# Altium PCB Controlador de velocidad - Placa superior_1.PcbDoc
Units mil, origin at the board's own origin, x right, y up, seen from the top; angles counter-clockwise.
Board outline 3345.63 x 1457.54 mil, 2 copper layers (Top Layer, Bottom Layer); 38 components, 45 nets, 138 pads, 37 vias.
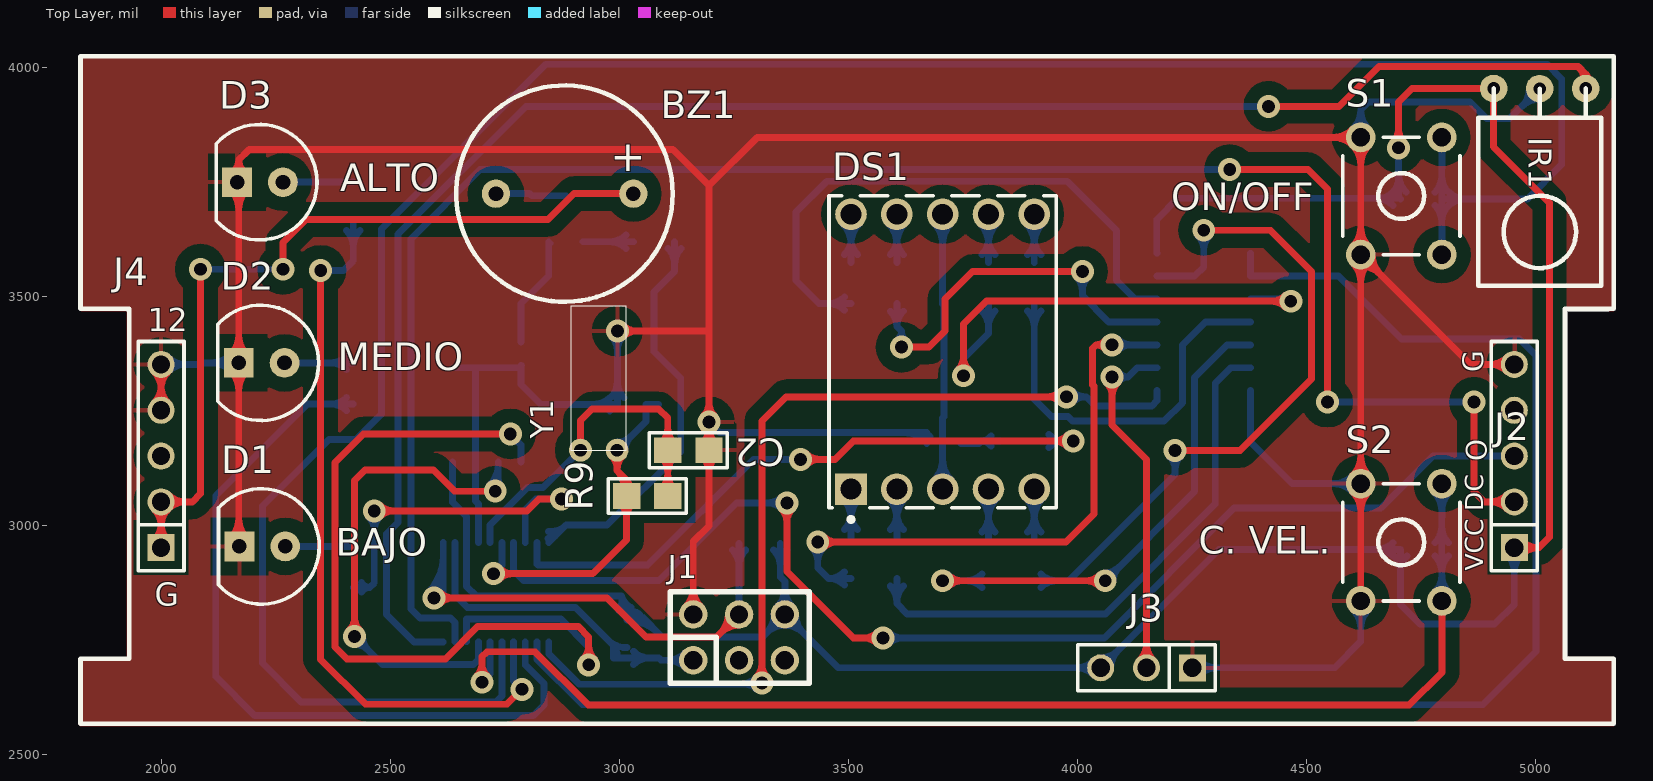
[diagram p0: Top Layer view]
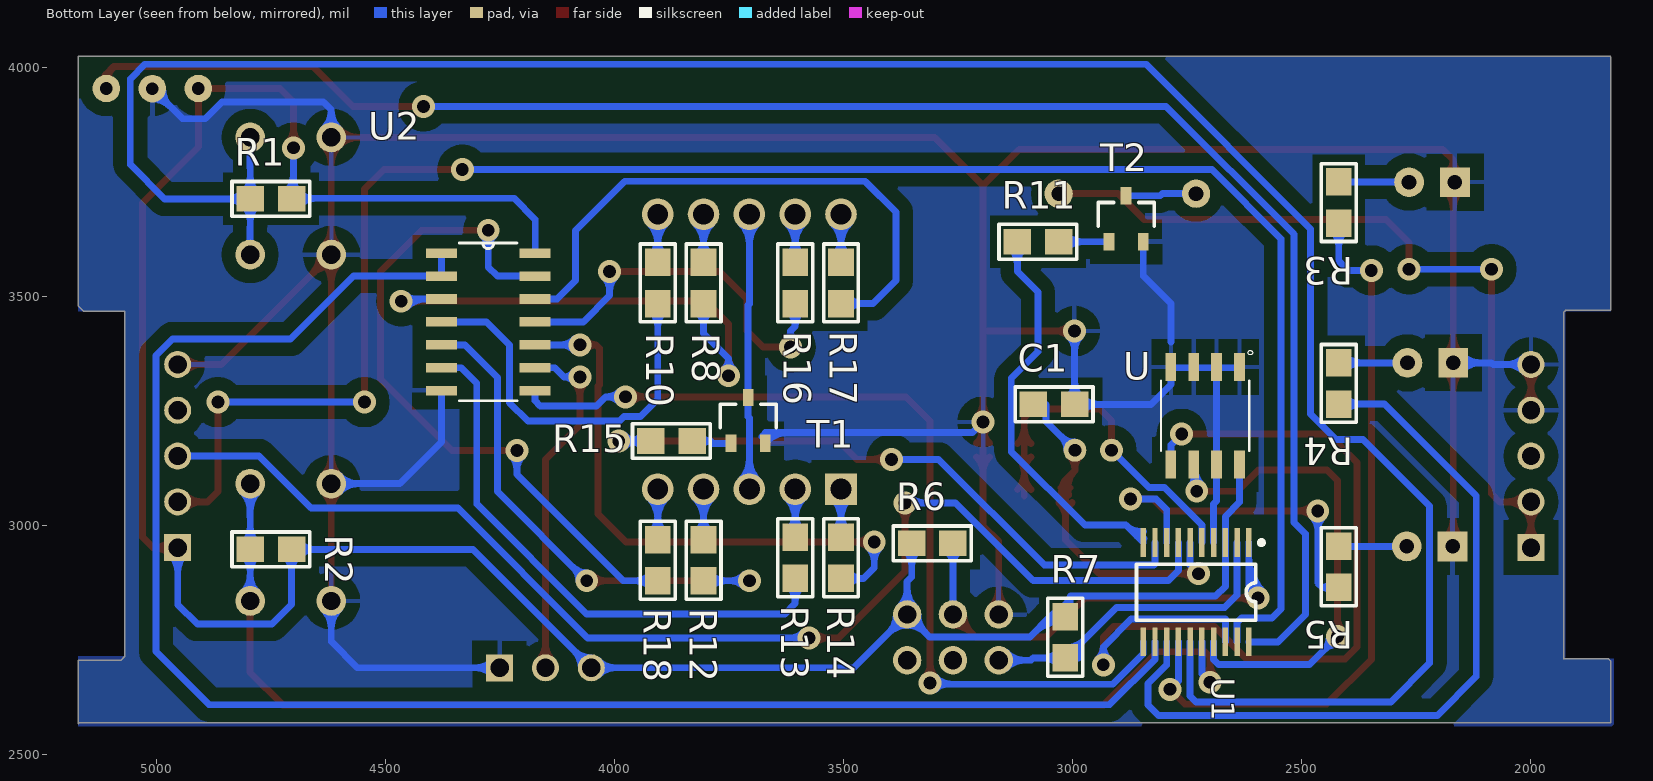
[diagram p1: Bottom Layer view, seen from below]

## Layer stack, top to bottom
Top Layer: signal copper 1.4
Dielectric: dielectric 12.6, FR-4, Dk 4.8
Bottom Layer: signal copper 1.4

## Board outline
1824.37,4023.48 1825.89,4025 5170,4025 5170,3480 5158.76,3468.76 5068.29,3468.76 5068.29,2715.02 5076.85,2706.45 5169.57,2706.45 5169.57,2567.46 5167.03,2570 1825,2570 1825,2705 1830,2710 1927.84,2710 1927.84,3465.32 1924.4,3468.76 1923.15,3470.01 1824.37,3470.01 1824.37,4023.48

## Design rules (kind name [scope] priority, off if disabled: settings)
Clearance gnd [InPolygon] p1: gap=30
Clearance Clearance_1 [All] p2: gap=10
PolygonConnect [All] p1: connectstyle=Relief reliefconductorwidth=10 reliefentries=4 polygonreliefangle="90 Angle"
RoutingVias [All] p1: holewidth=28 width=50 viastyle="Through Hole" minholewidth=28 minwidth=50 maxholewidth=28 maxwidth=50
SilkscreenOverComponentPads [All] p1: minsilkscreentomaskgap=10
SolderMaskExpansion [All] p1: expansion=4
TestPointUsage [All] p1: valid=0 allowmultiple=FALSE
Testpoint [All] p1: side=15 testpointundercomponent=TRUE minsize=40 maxsize=100 preferedsize=60 minholesize=0 maxholesize=40 preferedholesize=32 testpointgrid=1 style=1023 order=0123456789
Width [All] p1: maxlimit=20 minlimit=10 preferedwidth=10 toplayer_minwidth=15 toplayer_prefwidth=15 bottomlayer_minwidth=15 bottomlayer_maxwidth=15 bottomlayer_prefwidth=15 minimp=50.000000 maximp=50.000000 favimp=50.000000
23 further rules are at their usual default settings.

## Components (designator, comment, footprint, x,y, rotation, side; value= is the part's Value field where it differs from the comment)
BZ1 "BUZZER CON OSCILADOR" "BUZZER 12MM" 2880,3725 r180 top
C1 "22p" 0805 3040,3265 r180 bottom
C2 "22p" 0805 3150,3165 r0 top
D1 "ROJO" LED5 2220,2955 r180 top
D2 "AMARILLO" LED5 2218.48,3355.63 r180 top
D3 "VERDE" LED5 2215,3750 r180 top
DS1 "HDSP-5503" H-10 3705,3380 r0 top
IR1 "IRM8601S" IRM8601S 5142.01,3891.1 r180 top
J1 "BDM Port" JBDM 3160.63,2706.52 r0 top
J2 "CONECTOR-P. INFERIOR" SIP5 4952.83,2952.18 r90 top
J3 "JUMPER" JUMPER3 4150,2690 r180 top
J4 "CONECTOR-P. INFERIOR" SIP5 1999,2952.18 r90 top
R1 "10k" 0805 4749.37,3713.48 r180 bottom
R2 "10k" 0805 4749.37,2948.48 r180 bottom
R3 "330" 0805 2418.48,3705.63 r270 bottom
R4 "330" 0805 2418.48,3310.63 r270 bottom
R5 "330" 0805 2418.48,2910.63 r270 bottom
R6 "4K7" 0805 3305.63,2961.52 r180 bottom
R7 "4K7" 0805 3015.63,2756.52 r270 bottom
R8 "330" 0805 3805,3530 r90 bottom
R9 "3M" 0805 3060,3065 r180 top (schematic designator R5)
R10 "330" 0805 3905,3530 r90 bottom
R11 "10K" 0805 3075,3620 r180 bottom
R12 "330" 0805 3805,2925 r90 bottom
R13 "330" 0805 3605,2930 r90 bottom
R14 "330" 0805 3505,2930 r90 bottom
R15 "10k" 0805 3875,3185 r180 bottom
R16 "330" 0805 3605,3530 r90 bottom
R17 "330" 0805 3505,3530 r90 bottom
R18 "330" 0805 3905,2925 r90 bottom
S1 "ON/OFF" TACTSWITCH 4706.1,3719.85 r0 top
S2 "CV" TACTSWITCH 4706.1,2963.95 r0 top
T1 "BC817" SOT23 3745,3180 r180 bottom
T2 "BC817" SOT23 2920,3620 r180 bottom
U "24C64" SOIC127P600X175-8N 2710,3240 r270 bottom
U1 "MC9S08SH4 (TSSOP20)" TSSOP20 2730,2855 r0 bottom
U2 "74HC164D" SOIC127P600X175-14N 4275,3445 r180 bottom (schematic designator U1)
Y1 "32.768 KHz" X32768 2995,3165 r180 top

## Footprints (in the part's own frame and the unit in brackets; to place one, negate y for a bottom-side part, rotate by r counter-clockwise, add the part's x,y. Pads: shape width x height; smd on the part's side, far side on the other; paste and mask are expansions set on the pad)
0805 [mil] "Pasivo 0805"
  rect 60x56 smd: 1(-45,0) 2(45,0)
  silkscreen extent -85,-38 85,38, body extent -40,-25 39,25, height 15
"BUZZER 12MM" [mil]
  round 62 hole 32: 1(-150,0) 2(150,0)
  silkscreen extent -236,-236 236,236, body extent -368,-236 240,236, height 380
H-10 [mil] "LED, 7-Segment Display, 14.22 mm, RHD; 10 Leads; Row Space 15.24 mm; Pitch 2.54 mm"
  rect 69x69 hole 45.5: 1(-200,-300)
  round 69 hole 45.5: 2(-100,-300) 3(0,-300) 4(100,-300) 5(200,-300) 6(200,300) 7(100,300) 8(0,300) 9(-100,300) 10(-200,300)
  silkscreen extent -248,-371 248,341
IRM8601S [mm]
  round 1.524 hole 0.7: 1(0.85,-1.61) 2(3.4,-1.6) 3(5.95,-1.61)
  silkscreen extent -0.01,-1.61 6.8,9.33
JBDM [mil]
  round 62 hole 40: 1(0,0) 2(0,100) 3(100,0) 4(100,100) 5(200,0) 6(200,100)
  silkscreen extent -50,-50 253,150
JUMPER3 [mm]
  rect 1.5x1.5 hole 1.016: 1(-2.54,0)
  round 1.5 hole 1.016: 2(0,0) 3(2.54,0)
  silkscreen extent -3.81,-1.27 3.81,1.27, body extent -3.81,-1.3 3.81,1.27, height 16.15
LED5 [mil]
  round 65 hole 32: 1(-50,0)
  rect 65x65 hole 32: 2(50,0)
  silkscreen extent -124,-126 96,126, body extent -117,-117 97,120, height 485
SIP5 [mm]
  rect 1.5x1.5 hole 1.016: 1(0,0)
  round 1.5 hole 1.016: 2(2.54,0) 3(5.08,0) 4(7.62,0) 5(10.16,0)
  silkscreen extent -1.27,-1.27 11.43,1.27, body extent -1.27,-1.27 11.43,1.27, height 8.38
SOIC127P600X175-8N [mm]
  rect 1.55x0.6 smd: 1(-2.7,1.905) 2(-2.7,0.635) 3(-2.7,-0.635) 4(-2.7,-1.905) 5(2.7,-1.905) 6(2.7,-0.635) 7(2.7,0.635) 8(2.7,1.905)
  silkscreen extent -3.63,-2.45 1.95,2.63
SOIC127P600X175-14N [mil]
  rect 67x21 smd: 1(-102,150) 2(-102,100) 3(-102,50) 4(-102,0) 5(-102,-50) 6(-102,-100) 7(-102,-150) 8(102,-150) 9(102,-100) 10(102,-50) 11(102,0) 12(102,50) 13(102,100) 14(102,150)
  silkscreen extent -63,-172 63,172
SOT23 [mm]
  rect 0.6x0.95 smd: 1(0,0) 2(0.95,2.55) 3(1.9,0)
  silkscreen extent -0.6,0.87 2.5,2.18, body extent -0.53,-0.25 2.47,2.88, height 1
TACTSWITCH [mil]
  round 65 hole 40: 1(-88.58,-127.95) 1(-88.58,127.95) 2(88.58,-127.95) 2(88.58,127.95)
  silkscreen extent -128,-128 128,128, body extent -120,-156 124,156, height 276
TSSOP20 [mm]
  rect 0.3x1.6 smd: 1(-2.925,-2.75) 2(-2.275,-2.75) 3(-1.625,-2.75) 4(-0.975,-2.75) 5(-0.325,-2.75) 6(0.325,-2.75) 7(0.975,-2.75) 8(1.625,-2.75) 9(2.275,-2.75) 10(2.925,-2.75) 11(2.925,2.75) 12(2.275,2.75) 13(1.625,2.75) 14(0.975,2.75) 15(0.325,2.75) 16(-0.325,2.75) 17(-0.975,2.75) 18(-1.625,2.75) 19(-2.275,2.75) 20(-2.925,2.75)
  silkscreen extent -3.75,-2.87 3.3,1.55
X32768 [mil]
  round 50 hole 28: 1(80.5,0) 2(0.5,0)
  silkscreen extent -19,-315 101,0

## Part data
BZ1: library part BUZZER
C1 C2: library part CAP
D1 D2 D3: library part LED
DS1: "14.22 mm Gray Surface HER 7-Segment Display: CC, RH DP"
IR1: "Sensor IR"
J1: library part JBDM
J2 J4: library part CON5
J3: library part JUMPER3
R1 R2 R3 R4 R5 R6 R7 R8 R9 R10 R11 R12 R13 R14 R15 R16 R17 R18: library part RES
S1 S2: library part "TACT SWITCH"
T1 T2: library part "TRANSISTOR NPN"
U: library part AT24C256C-SSHL-T, "EEPROM Memory IC 256Kb _32K x 8_ I²C 1MHz 550ns 8-SOIC"
U1: library part MC9S08SH8_20
U2: library part 74HC164D,653, "Shift Shift Register 1 Element 8 Bit 14-SO"
Y1: library part CRYSTAL

## Via types
v1: diameter 50, hole 28, Top Layer to Bottom Layer, 37 vias

## Nets (pads, with @x,y where several pads share a name; then routed paths per layer and width w, separated by ;. In a path a pad name is that pad's centre, name@x,y a point inside that pad or via, vN(x,y) a via of type N, cw(c..) or ccw(c..) an arc to the next point about the centre after c; other vN are vias at no path point)
12V: BZ1.1 J4.1 J4.2 | length 1983.7
  Top Layer w15: J4.1@1983.42,2967.75 ccw(c1945.82,3005.36) 1999,3005.36 ccw(c2052.18,3005.36) J4.1@2014.57,2967.75 ; J4.2@1983.42,3036.6 cw(c1945.82,2999) 1999,2999 cw(c2052.18,2999) 2014.57,3036.6 cw(c2052.18,2999) 2052.18,3052.18 cw(c2052.18,3105.36) J4.2@2014.57,3067.75 ; J4.1 J4.2 2067.18,3052.18 2085,3070 2085,3555 v1@2090,3560 ; v1(2265,3560) 2265,3618.48 2315,3668.48 2843.48,3668.48 2900,3725 BZ1.1
  Bottom Layer w15: v1(2085,3560) v1(2265,3560)
A4: J1.1 R7.2 U1.2 | length 954.2
  Bottom Layer w15: U1.2 2640.43,2848.48 2667.43,2821.48 2903.37,2821.48 2986.37,2738.48 2986.37,2711.52 R7.2 3085.37,2711.52 3090.37,2706.52 J1.1 ; 2973.27,2751.57 ccw(c3015.64,2793.93) R7.2@3015.64,2734.02 ; 2983.69,2741.15 cw(c2956.06,2713.52) R7.2@2995.14,2713.52 ; R7.2@3030.13,2697.03 cw(c3065.13,2662.03) 3065.13,2711.52 cw(c3065.13,2761.01) R7.2@3030.13,2726.02 ; J1.1@3144.02,2689.91 ccw(c3103.9,2649.79) 3103.9,2706.52 ccw(c3103.9,2763.26) J1.1@3144.02,2723.14
A5: J1.4 R6.2 U1.1 | length 1413.7
  Top Layer w15: v1(2594.84,2842.48) 2972.52,2842.48 3057.52,2757.48 3211.59,2757.48 J1.4 ; v1@2607.22,2830.1 cw(c2637.09,2800.23) 2637.09,2842.48 cw(c2637.09,2884.73) v1@2607.22,2854.85 ; J1.4@3237.14,2806.52 cw(c3180.4,2806.52) 3220.52,2766.41 cw(c3260.64,2726.29) J1.4@3260.64,2783.02
  Bottom Layer w15: v1@2582.47,2854.85 ccw(c2504.31,2933.01) U1.1@2614.84,2933.01 ; v1@2593.07,2844.24 ccw(c2540.52,2896.8) 2614.84,2896.8 ; v1(2594.84,2842.48) 2614.84,2862.48 U1.1 ; v1@2603.68,2833.64 ccw(c2576.73,2860.58) 2614.84,2860.58 ; R6.2@3246.14,2947.03 cw(c3211.14,2912.03) 3260.64,2912.03 cw(c3310.13,2912.03) R6.2@3275.13,2947.03 ; J1.4 R6.2
B6: C1.1 R9.2 U1.6 Y1.2 | length 1176.6
  Top Layer w15: v1(2724.37,2895.48) 2941.37,2895.48 3015,2969.11 R9.2 3015,3100 ; v1@2736.74,2883.1 cw(c2766.61,2853.23) 2766.61,2895.48 cw(c2766.61,2937.73) v1@2736.74,2907.85 ; Y1.2@2982.12,3152.63 cw(c2952.25,3122.75) 2994.5,3122.75 cw(c3036.75,3122.75) Y1.2@3006.87,3152.63 ; 2993.84,3121.16 cw(c2954.87,3082.18) R9.2@3007.72,3066.56 ; Y1.2 2994.5,3120.5 3015,3100 ; R9.2@3000.5,3050.51 cw(c2965.51,3015.51) 3015,3015.51 cw(c3064.49,3015.51) R9.2@3029.49,3050.51 ; R9.2@3004.97,3082.88 ccw(c2995.37,3100) 3015,3100 ; 3011.68,3103.32 cw(c2982.41,3074.04) R9.2@3022.11,3062.31 ; R9.2@3025.03,3082.88 cw(c3034.63,3100) 3015,3100
  Bottom Layer w15: v1(2724.37,2895.48) 2742.8,2913.91 U1.6 ; Y1.2 3057.37,3227.87 3057.37,3265 C1.1 ; Y1.2@2994.5,3182.5 ccw(c2994.5,3224.75) 3024.37,3194.88 ccw(c3054.25,3165) Y1.2@3012,3165
B7: C2.1 R9.1 U1.5 Y1.1 | length 980.3
  Top Layer w15: Y1.1 2914.5,3229.5 2940,3255 3085,3255 3105,3235 C2.1 R9.1 ; R9.1@3090.5,3079.5 ccw(c3055.51,3114.49) 3105,3114.49 ccw(c3154.49,3114.49) R9.1@3119.49,3079.5 ; C2.1@3090.5,3150.51 cw(c3055.51,3115.51) 3105,3115.51 cw(c3154.49,3115.51) C2.1@3119.49,3150.51 ; C2.1@3090.5,3179.5 ccw(c3055.51,3214.49) 3105,3214.49 ccw(c3154.49,3214.49) C2.1@3119.49,3179.5
  Bottom Layer w15: U1.5 2717.2,3001.48 2799.2,3083.48 2832.98,3083.48 Y1.1
BUZZER: R11.1 U1.10 | length 1009
  Bottom Layer w15: U1.10@2843.91,2972.31 ccw(c2845.48,2993.16) 2860.26,2978.38 ; U1.10@2845.04,2987.27 ccw(c2848.73,3036.11) 2883.36,3001.48 ; U1.10 2883.37,3001.48 ; R11.1@3105.5,3605.51 cw(c3070.51,3570.51) 3120,3570.51 cw(c3169.49,3570.51) R11.1@3134.49,3605.51 ; R11.1 3120,3555 3075,3510 3075,3380 3133.37,3321.63 3133.37,3162.48 2972.37,3001.48 2883.37,3001.48
CLOCK: U1.11 U2.8 | length 2276.6
  Top Layer w15: v1@3297.99,2668.85 ccw(c3268.12,2698.73) 3310.37,2698.73 ccw(c3352.61,2698.73) v1@3322.74,2668.85 ; v1(3310.37,2656.48) 3310.37,3228.48 3363.37,3281.48 v1(3975.37,3281.48) ; v1@3962.99,3269.1 ccw(c3933.12,3239.23) 3933.12,3281.48 ccw(c3933.12,3323.73) v1@3962.99,3293.85
  Bottom Layer w15: U1.11 2845.16,2721.48 2912.66,2653.98 3307.87,2653.98 v1(3310.37,2656.48) ; 3262.08,2653.98 ccw(c3262.08,2704.76) v1@3297.99,2668.85 ; 3274.15,2653.98 cw(c3274.15,2620.26) v1@3297.99,2644.1 ; v1(3975.37,3281.48) 4018.52,3281.48 4038.52,3261.48 4161.48,3261.48 4173,3273 U2.8 ; v1@3987.74,3269.1 cw(c4017.61,3239.23) 4017.61,3281.48 cw(c4017.61,3323.73) v1@3987.74,3293.85
CV: R2.1 S2.2 U1.16 | length 3141.2
  Top Layer w15: v1@2686.99,2670.85 ccw(c2657.12,2700.73) 2699.37,2700.73 ccw(c2741.61,2700.73) v1@2711.74,2670.85 ; v1(2699.37,2658.48) 2699.37,2714.37 2710,2725 2815,2725 2931.52,2608.48 4723.48,2608.48 4794.68,2679.68 S2.2@4794.68,2836
  Bottom Layer w15: v1(2699.37,2658.48) 2717.2,2676.31 U1.16 ; S2.2@4777,3074.23 cw(c4734.33,3031.55) 4794.68,3031.55 cw(c4855.04,3031.55) S2.2@4812.36,3074.23 ; S2.2@4778.12,2854.73 ccw(c4745.63,2891.47) 4794.68,2891.47 ccw(c4843.74,2891.47) S2.2@4811.24,2854.73 ; R2.1@4779.87,2933.98 cw(c4744.87,2898.99) 4794.37,2898.99 cw(c4843.86,2898.99) R2.1@4808.86,2933.98 ; R2.1@4779.87,2962.97 ccw(c4744.87,2997.97) 4794.37,2997.97 ccw(c4843.86,2997.97) R2.1@4808.86,2962.97 ; S2.2@4794.68,2836 4794.68,2891.48 4794.37,2891.79 R2.1 4794.37,3019.48 4794.68,3019.79 S2.2@4794.68,3091.9
DATA: U1.12 U2.1 U2.2 | length 3699.4
  Bottom Layer w15: U1.12 2819.57,2708.48 2918.57,2609.48 4884.48,2609.48 5000.37,2725.37 5000.37,3371.48 4964.37,3407.48 4706.89,3407.48 4569.37,3545 U2.2 U2.1
DC0: J2.2 U1.19 | length 4199.8
  Top Layer w15: v1(4331.52,3777.48) 4502.52,3777.48 4545,3735 v1(4545,3270) ; v1(4865,3270) 4865,3075 4887.82,3052.18 J2.2 ; J2.2@4937.25,3036.6 ccw(c4899.65,2999) 4899.65,3052.18 ccw(c4899.65,3105.36) J2.2@4937.25,3067.75
  Bottom Layer w15: U1.19 2640.43,2788.48 2630.43,2798.48 2564.37,2798.48 2544.37,2818.48 2544.37,3626.48 2695.37,3777.48 v1(4331.52,3777.48) ; v1(4545,3270) v1(4865,3270)
GND: C1.2 C2.2 D1.2 D2.2 D3.2 IR1.2 J1.2 J2.5 J3.1 J4.4 J4.5 S1.1 S2.1 T1.3 T2.3 U1.4 U2.7 U.1 U.2 U.3 U.4 U.7 | length 12060.2
  Top Layer w15: J4.4@1983.42,3267.75 ccw(c1945.82,3305.36) 1999,3305.36 ccw(c2052.18,3305.36) J4.4@2014.57,3267.75 ; J4.5@1983.42,3336.6 cw(c1945.82,3299) 1999,3299 cw(c2052.18,3299) J4.5@2014.57,3336.6 ; J4.4 J4.5 ; D1.2@2150.8,2973.31 ccw(c2108.12,3015.99) 2168.48,3015.99 ccw(c2228.83,3015.99) D1.2@2186.15,2973.31 ; D2.2@2150.8,3337.96 cw(c2108.12,3295.28) 2168.48,3295.28 cw(c2228.83,3295.28) D2.2@2186.15,3337.96 ; D2.2@2150.8,3373.31 ccw(c2108.12,3415.99) 2168.48,3415.99 ccw(c2228.83,3415.99) D2.2@2186.15,3373.31 ; D3.2@2150.8,3732.96 cw(c2108.12,3690.28) 2168.48,3690.28 cw(c2228.83,3690.28) D3.2@2186.15,3732.96 ; D3.2@2154.2,3771.16 ccw(c2135.2,3798.48) 2168.48,3798.48 ; D1.2@2168.48,2955.63 D2.2 2168.48,3798.48 ; D3.2@2182.75,3771.16 cw(c2201.75,3798.48) 2168.48,3798.48 ; v1(2995,3425) 3195,3425 ; v1@3007.37,3412.63 cw(c3037.25,3382.75) 3037.25,3425 cw(c3037.25,3467.25) v1@3007.37,3437.37 ; J1.2@3144.02,2823.14 ccw(c3103.9,2863.26) 3160.64,2863.26 ccw(c3217.37,2863.26) J1.2@3177.25,2823.14 ; J1.2 3160.64,2965.64 3195,3000 C2.2 v1(3195,3226.64) 3195,3742.48 ; C2.2@3180.5,3150.51 cw(c3145.51,3115.51) 3195,3115.51 cw(c3244.49,3115.51) C2.2@3209.49,3150.51 ; C2.2@3180.5,3179.5 ccw(c3145.51,3214.49) 3195,3214.49 ccw(c3244.49,3214.49) C2.2@3209.49,3179.5 ; v1@3182.62,3214.27 cw(c3152.75,3184.4) 3195,3184.4 cw(c3237.25,3184.4) v1@3207.37,3214.27 ; v1@3182.62,3239.02 ccw(c3152.75,3268.89) 3195,3268.89 ccw(c3237.25,3268.89) v1@3207.37,3239.02 ; S2.1@4599.84,3074.23 cw(c4557.16,3031.55) 4617.52,3031.55 cw(c4677.87,3031.55) S2.1@4635.19,3074.23 ; S2.1@4599.84,3109.58 ccw(c4557.16,3152.26) 4617.52,3152.26 ccw(c4677.87,3152.26) S2.1@4635.19,3109.58 ; S1.1@4599.84,3574.23 cw(c4557.16,3531.55) 4617.52,3531.55 cw(c4677.87,3531.55) S1.1@4635.19,3574.23 ; S1.1@4599.84,3609.58 ccw(c4557.16,3652.26) 4617.52,3652.26 ccw(c4677.87,3652.26) S1.1@4635.19,3609.58 ; S1.1@4599.84,3865.48 cw(c4557.16,3908.16) 4557.16,3847.81 cw(c4557.16,3787.45) 4599.84,3830.13 cw(c4557.16,3787.45) 4617.52,3787.45 cw(c4677.87,3787.45) S1.1@4635.19,3830.13 ; S2.1@4617.52,2836 4617.52,3091.9 S1.1@4617.52,3591.9 ; S1.1@4617.52,3566.9 cw(c4617.52,3506.55) 4660.19,3549.23 cw(c4702.87,3591.9) S1.1@4642.52,3591.9 ; J2.5@4937.25,3336.6 ccw(c4899.65,3299) 4899.65,3352.18 ccw(c4899.65,3405.36) J2.5@4937.25,3367.75 ; J2.5 4857.24,3352.18 S1.1@4617.52,3591.9 ; 2168.48,3798.48 2191.48,3821.48 3116,3821.48 3195,3742.48 ; 3195,3742.48 3300.33,3847.81 4617.52,3847.81 S1.1@4617.52,3591.9
  Bottom Layer w15: J4.5 2081.37,3352.18 2084.82,3355.63 D2.2 ; J4.5@2014.57,3336.6 cw(c2052.18,3299) 2052.18,3352.18 cw(c2052.18,3405.36) J4.5@2014.57,3367.75 ; D2.2@2150.8,3337.96 ccw(c2108.12,3295.28) 2108.12,3355.63 ccw(c2108.12,3415.99) D2.2@2150.8,3373.31 ; U.1@2635,3345 U.2@2685,3345 ; U1.4 2691.61,3047.48 2685,3054.09 U.2@2685,3345 ; 2785,3401 2785,3485 2845.2,3545.2 T2.3 ; T2.3@2845.2,3613.48 T2.3@2848.46,3616.74 ; C1.2@2978.5,3250.51 ccw(c2943.51,3215.51) 2943.51,3265 ccw(c2943.51,3314.49) C1.2@2978.5,3279.5 ; C1.2@2980.5,3279.5 ccw(c2945.51,3314.49) 2995,3314.49 ccw(c3044.49,3314.49) C1.2@3009.49,3279.5 ; v1@2982.63,3412.63 cw(c2952.75,3382.75) 2995,3382.75 cw(c3037.25,3382.75) v1@3007.37,3412.63 ; v1@2995,3415 C1.2 2828.48,3265 2785,3308.48 2785,3350 2786,3350 2781,3345 U.2@2685,3345 ; v1(3195,3226.64) 3218.17,3203.48 3670.2,3203.48 T1.3 ; 3619.75,3203.48 cw(c3619.75,3136.44) T1.3@3667.15,3183.84 ; 3655.96,3203.48 cw(c3655.96,3172.65) T1.3@3677.76,3194.45 ; J3.1 4560,2690 4617.52,2747.52 S2.1@4617.52,2836 ; J3.1@4265.57,2674.42 cw(c4303.18,2636.82) 4303.18,2690 cw(c4303.18,2743.18) J3.1@4265.57,2705.58 ; U2.7 4377,3183 4468.1,3091.9 S2.1@4617.52,3091.9 ; S2.1@4599.84,2818.32 cw(c4557.16,2775.64) 4617.52,2775.64 cw(c4677.87,2775.64) S2.1@4635.19,2818.32 ; S2.1@4599.84,3074.23 ccw(c4557.16,3031.55) 4557.16,3091.9 ccw(c4557.16,3152.26) S2.1@4599.84,3109.58 ; S1.1@4599.97,3865.62 ccw(c4558.72,3907.51) 4617.52,3907.51 ; S1.1@4617.52,3847.81 4617.52,3907.52 ; S1.1@4635.06,3865.62 cw(c4676.31,3907.51) 4617.52,3907.51 ; IR1.2@4985.66,3954.09 cw(c4931.34,3954.09) 4969.75,3915.68 cw(c5008.16,3877.27) IR1.2@5008.16,3931.59 ; IR1.2 4942.54,3888.48 4892.54,3888.48 4856.01,3925 4635,3925 4617.52,3907.52
NetBZ1_2: BZ1.2 T2.2 | length 154.5
  Bottom Layer w15: BZ1.2 2803.37,3725 2807.97,3720.39 T2.2
NetD1_1: D1.1 R5.1 | length 140
  Bottom Layer w15: D1.1 R5.1@2410,2955
NetD2_1: D2.1 R4.1 | length 227.7
  Bottom Layer w15: D2.1 R4.1 ; R4.1@2403.98,3341.14 ccw(c2368.99,3306.14) 2368.99,3355.63 ccw(c2368.99,3405.13) R4.1@2403.98,3370.13
NetD3_1: D3.1 R3.1 | length 149.1
  Bottom Layer w15: D3.1@2269.37,3750.63 R3.1
NetDS1_1: DS1.1 R14.2 | length 285.1
  Bottom Layer w15: DS1.1@3485.91,3060.91 cw(c3439.82,3014.82) 3505,3014.82 cw(c3570.18,3014.82) DS1.1@3524.09,3060.91 ; R14.2@3490.5,2991.5 ccw(c3455.51,3026.49) 3505,3026.49 ccw(c3554.49,3026.49) R14.2@3519.49,2991.5 ; R14.2 DS1.1
NetDS1_2: DS1.2 R13.2 | length 285.1
  Bottom Layer w15: DS1.2@3585.91,3060.91 cw(c3539.82,3014.82) 3605,3014.82 cw(c3670.18,3014.82) DS1.2@3624.09,3060.91 ; R13.2@3590.5,2991.5 ccw(c3555.51,3026.49) 3605,3026.49 ccw(c3654.49,3026.49) R13.2@3619.49,2991.5 ; R13.2 DS1.2
NetDS1_3: DS1.3 DS1.8 T1.2 | length 806.9
  Bottom Layer w15: DS1.3@3685.91,3099.09 ccw(c3639.82,3145.18) 3705,3145.18 ccw(c3770.18,3145.18) DS1.3@3724.09,3099.09 ; DS1.8@3685.91,3660.91 cw(c3639.82,3614.82) 3705,3614.82 cw(c3770.18,3614.82) DS1.8@3724.09,3660.91 ; DS1.3 3705,3235.48 3707.6,3238.08 3707.6,3273.48 T1.2 3707.6,3481.51 3705,3484.11 DS1.8
NetDS1_4: DS1.4 R12.2 | length 290.1
  Bottom Layer w15: DS1.4@3785.91,3060.91 cw(c3739.82,3014.82) 3805,3014.82 cw(c3870.18,3014.82) DS1.4@3824.09,3060.91 ; R12.2@3790.5,2986.5 ccw(c3755.51,3021.49) 3805,3021.49 ccw(c3854.49,3021.49) R12.2@3819.49,2986.5 ; R12.2 DS1.4
NetDS1_5: DS1.5 R18.2 | length 290.1
  Bottom Layer w15: DS1.5@3885.91,3060.91 cw(c3839.82,3014.82) 3905,3014.82 cw(c3970.18,3014.82) DS1.5@3924.09,3060.91 ; R18.2@3890.5,2986.5 ccw(c3855.51,3021.49) 3905,3021.49 ccw(c3954.49,3021.49) R18.2@3919.49,2986.5 ; R18.2 DS1.5
NetDS1_6: DS1.6 R10.2 | length 285.1
  Bottom Layer w15: DS1.6@3885.91,3660.91 cw(c3839.82,3614.82) 3905,3614.82 cw(c3970.18,3614.82) DS1.6@3924.09,3660.91 ; R10.2@3890.5,3591.5 ccw(c3855.51,3626.49) 3905,3626.49 ccw(c3954.49,3626.49) R10.2@3919.49,3591.5 ; R10.2 DS1.6
NetDS1_7: DS1.7 R8.2 | length 285.1
  Bottom Layer w15: DS1.7@3785.91,3660.91 cw(c3739.82,3614.82) 3805,3614.82 cw(c3870.18,3614.82) DS1.7@3824.09,3660.91 ; R8.2@3790.5,3591.5 ccw(c3755.51,3626.49) 3805,3626.49 ccw(c3854.49,3626.49) R8.2@3819.49,3591.5 ; R8.2 DS1.7
NetDS1_9: DS1.9 R16.2 | length 285.1
  Bottom Layer w15: DS1.9@3585.91,3660.91 cw(c3539.82,3614.82) 3605,3614.82 cw(c3670.18,3614.82) DS1.9@3624.09,3660.91 ; R16.2@3590.5,3591.5 ccw(c3555.51,3626.49) 3605,3626.49 ccw(c3654.49,3626.49) R16.2@3619.49,3591.5 ; R16.2 DS1.9
NetDS1_10: DS1.10 R17.2 | length 285.1
  Bottom Layer w15: DS1.10@3485.91,3660.91 cw(c3439.82,3614.82) 3505,3614.82 cw(c3570.18,3614.82) DS1.10@3524.09,3660.91 ; R17.2@3490.5,3591.5 ccw(c3455.51,3626.49) 3505,3626.49 ccw(c3554.49,3626.49) R17.2@3519.49,3591.5 ; R17.2 DS1.10
NetJ3_2: J3.2 U2.9 | length 970.9
  Top Layer w15: v1@4062.63,3312.63 cw(c4032.75,3282.75) 4075,3282.75 cw(c4117.25,3282.75) v1@4087.37,3312.63 ; v1(4075,3325) 4075,3220 4150,3145 J3.2 ; J3.2@4134.42,2705.58 ccw(c4096.82,2743.18) 4150,2743.18 ccw(c4203.18,2743.18) J3.2@4165.57,2705.58
  Bottom Layer w15: v1(4075,3325) 4110,3325 ; v1@4089,3314.5 cw(c4110,3298.75) 4110,3325 ; v1@4089,3335.5 ccw(c4110,3351.25) 4110,3325 ; U2.9 4130,3345 4110,3325
NetR8_1: R8.1 U2.3 | length 1449.1
  Top Layer w15: v1@3737.99,3339.85 ccw(c3708.12,3369.73) 3750.37,3369.73 ccw(c3792.61,3369.73) v1@3762.74,3339.85 ; v1(3750.37,3327.48) 3750.37,3440.37 3800.48,3490.48 v1@4465,3490.48 ; 4421.6,3490.48 cw(c4421.6,3446.6) v1@4452.63,3477.63 ; 4423.9,3490.48 ccw(c4423.9,3531.1) v1@4452.63,3502.37
  Bottom Layer w15: v1@3739.02,3340.8 ccw(c3718.1,3365.36) 3750.37,3365.36 ; v1(3750.37,3327.48) 3750.37,3365.37 ; v1@3761.71,3340.8 cw(c3782.63,3365.36) 3750.37,3365.36 ; R8.1@3790.5,3468.51 cw(c3755.51,3433.51) 3805,3433.51 cw(c3854.49,3433.51) R8.1@3819.49,3468.51 ; R8.1 3805,3420 3750.37,3365.37 ; U2.3 v1@4465,3495 ; 4410.68,3495 cw(c4410.68,3435.68) v1@4452.63,3477.63 ; 4434.82,3495 ccw(c4434.82,3520.18) v1@4452.63,3502.37
  other v1: 4465,3490
NetR10_1: R10.1 U2.4 | length 942.3
  Bottom Layer w15: R10.1@3890.5,3468.51 cw(c3855.51,3433.51) 3905,3433.51 cw(c3954.49,3433.51) R10.1@3919.49,3468.51 ; R10.1 3905,3275.84 3942.37,3238.48 3978.37,3238.48 3988.37,3228.48 4188.37,3228.48 4228.37,3268.48 4228.37,3394.97 4278.4,3445 U2.4
NetR11_2: R11.2 T2.1 | length 187.7
  Bottom Layer w15: T2.1 R11.2 ; R11.2@3013.5,3605.51 ccw(c2978.51,3570.51) 2978.51,3620 ccw(c2978.51,3669.49) R11.2@3013.5,3634.5
NetR12_1: R12.1 U2.5 | length 1474.4
  Top Layer w15: v1(3705,2880) v1(4060,2880) ; v1@3717.37,2867.63 cw(c3747.25,2837.75) 3747.25,2880 cw(c3747.25,2922.25) v1@3717.37,2892.37 ; v1@4047.63,2867.63 ccw(c4017.75,2837.75) 4017.75,2880 ccw(c4017.75,2922.25) v1@4047.63,2892.37
  Bottom Layer w15: v1(3705,2880) R12.1 ; v1@3717.37,2867.63 cw(c3747.25,2837.75) 3747.25,2880 cw(c3747.25,2922.25) v1@3717.37,2892.37 ; R12.1@3790.5,2865.51 ccw(c3755.51,2830.51) 3755.51,2880 ccw(c3755.51,2929.49) R12.1@3790.5,2894.5 ; v1(4060,2880) 4254.87,3074.87 4254.87,3323.98 4325.89,3395 U2.5 ; v1@4060,2897.5 ccw(c4060,2939.75) 4089.87,2909.87 ccw(c4119.75,2880) v1@4077.5,2880
NetR13_1: R13.1 U2.6 | length 1291.1
  Bottom Layer w15: R13.1@3590.5,2868.51 cw(c3555.51,2833.51) 3605,2833.51 cw(c3654.49,2833.51) R13.1@3619.49,2868.51 ; R13.1 3605,2830 3627.5,2807.5 4060.39,2807.5 4300,3047.11 4300,3310.64 4334.37,3345 U2.6
NetR14_1: R14.1 U2.10 | length 1598
  Top Layer w15: v1(3432.37,2964.48) 3973.93,2964.48 4035,3025.55 4035,3304.9 4032.5,3307.4 4032.5,3387.5 4040,3395 ; v1@3444.74,2952.1 cw(c3474.61,2922.23) 3474.61,2964.48 cw(c3474.61,3006.73) v1@3444.74,2976.85 ; v1@4061,3384.5 ccw(c4040,3368.75) 4040,3395 ; v1@4061,3405.5 cw(c4040,3421.25) 4040,3395 ; v1@4075.37,3395 4040,3395
  Bottom Layer w15: v1@3419.99,2952.1 cw(c3390.12,2922.23) 3432.37,2922.23 cw(c3474.61,2922.23) v1@3444.74,2952.1 ; v1(3432.37,2964.48) 3432.37,2908.48 3455.84,2885 ; R14.1@3490.43,2870.58 ccw(c3455.84,2836.32) 3455.84,2885 ; R14.1@3490.43,2899.43 cw(c3455.84,2933.68) 3455.84,2885 ; R14.1 3455.84,2885 ; v1(4075,3395) U2.10 ; v1@4087.37,3382.63 cw(c4117.25,3352.75) 4117.25,3395 cw(c4117.25,3437.25) v1@4087.37,3407.37
NetR15_2: R15.2 T1.1 | length 138.1
  Bottom Layer w15: T1.1 3784.37,3180 3789.37,3185 ; R15.2@3811.02,3173.51 ccw(c3789.37,3158.85) 3789.37,3185 ; R15.2@3811.02,3196.49 cw(c3789.37,3211.15) 3789.37,3185 ; R15.2 3789.37,3185
NetR16_1: R16.1 U2.11 | length 1032
  Top Layer w15: v1(3615,3390) 3675,3390 3710,3425 3710,3495 3770,3555 v1(4010,3555)
  Bottom Layer w15: R16.1@3590.82,3468.19 cw(c3559.06,3435) 3605,3435 ; v1@3604.5,3404 ccw(c3588.75,3425) 3615,3425 ; R16.1 3605,3435 ; v1(3615,3390) 3615,3425 ; R16.1@3619.17,3468.19 ccw(c3650.94,3435) 3605,3435 ; v1@3625.5,3404 cw(c3641.25,3425) 3615,3425 ; v1@3997.63,3542.63 cw(c3967.75,3512.75) 4010,3512.75 cw(c4052.25,3512.75) v1@4022.37,3542.63 ; v1(4010,3555) 4010,3502.5 4067.5,3445 U2.11 ; 3605,3435 3615,3425
NetR17_1: R17.1 U2.12 | length 1354.9
  Bottom Layer w15: R17.1@3490.5,3470.51 ccw(c3455.51,3435.51) 3455.51,3485 ccw(c3455.51,3534.49) R17.1@3490.5,3499.5 ; R17.1 3435,3485 3385,3535 3385,3685 3452.03,3752.03 3977.03,3752.03 4084.37,3644.69 4084.37,3535 4124.37,3495 U2.12
NetR18_1: R18.1 U2.13 | length 1726
  Top Layer w15: v1(4212.37,3164.48) 4354.48,3164.48 4510,3320 4510,3555.27 4420.27,3645 v1(4275,3645)
  Bottom Layer w15: R18.1 3980,2880 4212.37,3112.37 v1(4212.37,3164.48) ; R18.1@3919.49,2865.51 cw(c3954.49,2830.51) 3954.49,2880 cw(c3954.49,2929.49) R18.1@3919.49,2894.5 ; U2.13 4255,3545 4275,3565 v1(4275,3645) ; v1@4199.99,3152.1 cw(c4170.12,3122.23) 4212.37,3122.23 cw(c4254.61,3122.23) v1@4224.74,3152.1 ; v1@4262.63,3632.63 cw(c4232.75,3602.75) 4275,3602.75 cw(c4317.25,3602.75) v1@4287.37,3632.63
ON/OFF: R1.1 S1.2 U1.15 | length 5479.7
  Bottom Layer w15: U1.15 2742.8,2628.48 2729.8,2615.48 2304.52,2615.48 2220,2700 2220,3043.11 2365.37,3188.48 2424.37,3188.48 2480,3244.11 2480,3648.11 2839.37,4007.47 5024.37,4007.47 5056.37,3975.48 5056.37,3788.48 4981.37,3713.48 R1.1 ; R1.1@4779.87,3698.98 cw(c4744.87,3663.99) 4794.37,3663.99 cw(c4843.86,3663.99) R1.1@4808.86,3698.98 ; R1.1@4779.87,3727.97 ccw(c4744.87,3762.97) 4794.37,3762.97 ccw(c4843.86,3762.97) R1.1@4808.86,3727.97 ; S1.2@4794.68,3591.9 4794.68,3652.48 4794.37,3652.79 R1.1 ; S1.2@4794.68,3847.81 4794.68,3780.79 4794.37,3780.48 R1.1 ; R1.1@4810.86,3698.98 cw(c4845.86,3663.99) 4845.86,3713.48 cw(c4845.86,3762.97) R1.1@4810.86,3727.97
OPTO: J2.3 U1.7 | length 2964.6
  Top Layer w15: v1@3352.63,3037.63 cw(c3322.75,3007.75) 3365,3007.75 cw(c3407.25,3007.75) v1@3377.37,3037.63 ; v1(3365,3050) 3365,2900 3510,2755 v1(3575,2755) ; v1@3562.63,2742.63 ccw(c3532.75,2712.75) 3532.75,2755 ccw(c3532.75,2797.25) v1@3562.63,2767.37
  Bottom Layer w15: U1.7 2768.39,2902.46 2790.37,2880.48 3085.37,2880.48 3254.89,3050 v1(3365,3050) ; v1@3352.63,3037.63 ccw(c3322.75,3007.75) 3322.75,3050 ccw(c3322.75,3092.25) v1@3352.63,3062.37 ; v1(3575,2755) 4057.89,2755 4341.37,3038.48 4661.37,3038.48 4775.07,3152.18 J2.3 ; v1@3587.37,2742.63 cw(c3617.25,2712.75) 3617.25,2755 cw(c3617.25,2797.25) v1@3587.37,2767.37
RX: IR1.1 U1.20 | length 3857.9
  Top Layer w15: v1(4416.37,3915.48) 4570.48,3915.48 4657.48,4002.48 5092.52,4002.48 ; IR1.1@5101.61,3957.32 ccw(c5063.07,3973.06) 5092.5,4002.5 ; 5108.46,3986.54 cw(c5085.73,3963.81) IR1.1@5115.49,3951.65 ; IR1.1 5108.55,3986.45 5092.52,4002.48
  Bottom Layer w15: U1.20 2614.84,2746.48 2551.37,2746.48 2491.37,2806.48 2491.37,2982.48 2516.37,3007.48 2516.37,3636.48 2795.37,3915.48 v1(4416.37,3915.48)
SCL: U1.17 U.6 | length 1279.3
  Top Layer w15: v1@2408.99,2770.85 ccw(c2379.12,2800.73) 2421.37,2800.73 ccw(c2463.61,2800.73) v1@2433.74,2770.85 ; v1(2421.37,2758.48) 2421.37,3098.48 2444.37,3121.48 2593.52,3121.48 2639.52,3075.48 v1(2728.37,3075.48)
  Bottom Layer w15: v1@2421.37,2740.98 cw(c2421.37,2698.73) 2451.24,2728.6 cw(c2481.11,2758.48) v1@2438.87,2758.48 ; v1(2421.37,2758.48) 2482.37,2697.48 2680.61,2697.48 2691.61,2708.48 U1.17 ; v1@2715.99,3087.85 ccw(c2670.1,3133.74) U.6 ; v1(2728.37,3075.48) 2735,3082.11 U.6@2735,3139 ; 2735,3101.71 ccw(c2754.6,3101.71) v1@2740.74,3087.85
SDA: U1.18 U.5 | length 2053.9
  Top Layer w15: v1(2761.37,3200.48) 2440.37,3200.48 2378.37,3138.48 2378.37,2735.48 2404.37,2709.48 2619.48,2709.48 2690,2780 2910,2780 2932.37,2757.63 v1(2932.37,2696.48) ; v1@2919.99,2708.85 ccw(c2890.12,2738.73) 2932.37,2738.73 ccw(c2974.61,2738.73) v1@2944.74,2708.85
  Bottom Layer w15: U1.18 2666.02,2796.48 2871.81,2796.48 2932.37,2735.92 ; v1(2761.37,3200.48) 2785,3176.84 U.5@2785,3139 ; v1@2920.62,2709.45 ccw(c2896.67,2735.92) 2932.37,2735.92 ; v1(2932.37,2696.48) 2932.37,2735.92 ; v1@2944.11,2709.45 cw(c2968.06,2735.92) 2932.37,2735.92
TR: R15.1 U1.9 | length 1677.3
  Top Layer w15: v1(3395,3145) 3470,3145 3510,3185 v1(3990,3185) ; v1@3407.37,3132.63 cw(c3437.25,3102.75) 3437.25,3145 cw(c3437.25,3187.25) v1@3407.37,3157.37 ; v1@3977.63,3172.63 ccw(c3947.75,3142.75) 3947.75,3185 ccw(c3947.75,3227.25) v1@3977.63,3197.37
  Bottom Layer w15: U1.9 2819.57,2916.07 2821.37,2914.27 3061.26,2914.27 3291.98,3145 v1(3395,3145) ; R15.1 v1(3990,3185) ; R15.1@3936.49,3170.51 cw(c3971.49,3135.51) 3971.49,3185 cw(c3971.49,3234.49) R15.1@3936.49,3199.5 ; v1@3977.63,3172.63 ccw(c3947.75,3142.75) 3947.75,3185 ccw(c3947.75,3227.25) v1@3977.63,3197.37
"USO ALTO": R5.2 U1.8 | length 964.4
  Top Layer w15: v1(2464.37,3032.5) 2797.5,3032.5 2823.48,3058.48 v1(2873.37,3058.48) ; v1@2476.74,3020.13 cw(c2506.61,2990.25) 2506.61,3032.5 cw(c2506.61,3074.75) v1@2476.74,3044.88
  Bottom Layer w15: R5.2 2454.37,2865.63 ; R5.2@2436.14,2855.22 cw(c2454.36,2844.47) 2454.36,2865.63 ; R5.2@2436.14,2876.05 ccw(c2454.36,2886.8) 2454.36,2865.63 ; v1@2451.99,3020.13 cw(c2422.12,2990.25) 2464.37,2990.25 cw(c2506.61,2990.25) v1@2476.74,3020.13 ; v1(2464.37,3032.5) 2464.37,2875.63 2454.37,2865.63 ; U1.8 2793.98,3035.48 2816.98,3058.48 v1(2873.37,3058.48)
"USO BAJO": R3.2 U1.14 | length 1693.2
  Top Layer w15: v1(2347.37,3557.36) 2347.37,2708.48 2445.37,2610.48 2754.09,2610.48 v1(2786.63,2643.02)
  Bottom Layer w15: v1(2347.37,3557.36) 2397.36,3557.36 2418.48,3578.48 R3.2 ; R3.2@2403.98,3644.14 cw(c2368.99,3609.14) 2418.48,3609.14 cw(c2467.97,3609.14) R3.2@2432.97,3644.14 ; U1.14 2768.39,2661.26 v1(2786.63,2643.02)
"USO MEDIO": R4.2 U1.13 | length 1772.1
  Bottom Layer w15: R4.2@2403.98,3251.14 ccw(c2368.99,3216.14) 2368.99,3265.63 ccw(c2368.99,3315.13) R4.2@2403.98,3280.13 ; R4.2 2318.37,3265.63 2118.37,3065.63 2118.37,2670.48 2203.09,2585.75 2812.14,2585.75 2834.87,2608.48 2834.87,2655.44 2793.98,2696.33 U1.13
VCC: IR1.3 J1.6 J2.1 J3.3 R1.2 R2.2 R6.1 R7.1 U1.3 U2.14 U.8 | length 6819
  Top Layer w15: v1@4687.63,3837.37 ccw(c4657.75,3867.25) 4700,3867.25 ccw(c4742.25,3867.25) v1@4712.37,3837.37 ; v1(4700,3825) 4700,3925 4729.49,3954.49 IR1.3 4907.76,3827.24 5030,3705 5030,2975 5007.18,2952.18 J2.1 ; J2.1@4968.4,2936.6 cw(c5006.01,2899) 5006.01,2952.18 cw(c5006.01,3005.36) J2.1@4968.4,2967.75
  Bottom Layer w15: U.8@2635,3139 2635,3051.5 2666.02,3020.48 U1.3 2666.02,2867.77 2687.32,2846.48 3004.37,2846.48 R7.1 3048.32,2801.52 ; R7.1@2998.75,2815.15 ccw(c2967.06,2837) 3004.4,2846.36 ccw(c3040,2855.28) R7.1@3024.37,2822.07 ; R7.1@3009.1,2806.41 cw(c3026.26,2788.33) 3043.88,2805.96 ; R7.1@3015.62,2809.02 cw(c3015.7,2748.38) 3058.58,2791.26 ; R7.1@3015.64,2794.02 cw(c3015.76,2697.32) 3084.14,2765.7 ; R7.1@3019.42,2795.53 cw(c3036.86,2777.16) 3054.77,2795.07 ; R7.1@3029.75,2784.65 cw(c3047.46,2765.98) 3065.66,2784.18 ; R7.1@3034.09,2792.6 cw(c3048.32,2785.72) 3048.32,2801.52 ; R7.1@3034.09,2810.45 ccw(c3048.32,2817.33) 3048.32,2801.52 ; R6.1@3336.14,2947.03 cw(c3301.14,2912.03) 3350.64,2912.03 cw(c3400.13,2912.03) R6.1@3365.13,2947.03 ; J1.6@3337.14,2806.52 cw(c3280.4,2806.52) 3320.52,2766.41 cw(c3360.64,2726.29) 3360.64,2783.02 cw(c3360.64,2726.29) 3400.75,2766.41 cw(c3440.87,2806.52) J1.6@3384.14,2806.52 ; J1.6@3344.02,2823.14 ccw(c3303.9,2863.26) 3360.64,2863.26 ccw(c3417.37,2863.26) J1.6@3377.25,2823.14 ; R6.1 3350.64,2888.48 3360.64,2878.48 J1.6 ; J3.3@4034.42,2674.42 ccw(c3996.82,2636.82) 3996.82,2690 ccw(c3996.82,2743.18) J3.3@4034.42,2705.58 ; J3.3@4050,2712.03 ccw(c4050,2765.21) 4087.6,2727.6 ccw(c4125.21,2690) J3.3@4072.03,2690 ; U2.14 4172.37,3595.63 4172.37,3668.48 4218.89,3715 R1.2@4702.84,3715 ; 4649.2,3715 cw(c4649.2,3660.31) R1.2@4687.87,3698.98 ; 4656.55,3715 ccw(c4656.55,3759.29) 4687.87,3727.97 ccw(c4658.58,3757.26) 4700,3757.26 ; R2.2@4687.87,2933.98 ccw(c4652.87,2898.99) 4652.87,2948.48 ccw(c4652.87,2997.97) R2.2@4687.87,2962.97 ; R2.2@4689.87,2933.98 cw(c4654.87,2898.99) 4704.37,2898.99 cw(c4753.86,2898.99) R2.2@4718.86,2933.98 ; 4700,3768.68 ccw(c4757.57,3768.68) R1.2@4716.86,3727.97 ; v1(4700,3825) 4700,3717.84 R1.2@4702.84,3715 ; R1.2 R1.2@4702.84,3715 ; J2.1@4937.25,2936.6 cw(c4899.65,2899) 4952.83,2899 cw(c5006.01,2899) J2.1@4968.4,2936.6 ; J2.1 4952.83,2828.48 4909.83,2785.48 4747.37,2785.48 4704.37,2828.48 R2.2 4308.48,2948.48 J3.3 3477.16,2690 J1.6 ; 3048.32,2801.52 3092.37,2757.48 3311.59,2757.48 J1.6
pads on no net: J1.3 J1.5 J2.4 J4.3

## Polygon pours and split planes (outlines as drawn)
GND on Top Layer "Bottom Layer-No Net" (solid, remove dead copper, pour order 14): 1824.37,4023.48 5169.37,4023.48 5169.57,4023.27 5169.57,3468.35 5068.7,3468.35 5068.29,3468.76 5068.29,2715.02 5169.57,2715.02 5169.57,2562.84 1822.2,2562.84 1821.2,2563.84 1818.1,2566.94 1818.1,2710 1927.84,2710 1929.37,2708.48 1924.4,2713.44 1924.4,3468.76 1823.12,3468.76 1824.37,3470.01 1824.37,4023.48
GND on Bottom Layer "Bottom Layer-No Net" (solid, remove dead copper, pour order 12): 1824.37,4023.48 5169.37,4023.48 5169.57,4023.27 5169.57,3468.35 5068.7,3468.35 5068.29,3468.76 5068.29,2715.02 5169.57,2715.02 5169.57,2562.84 1822.2,2562.84 1821.2,2563.84 1818.1,2566.94 1818.1,2710 1927.84,2710 1929.37,2708.48 1924.4,2713.44 1924.4,3468.76 1823.12,3468.76 1824.37,3470.01 1824.37,4023.48

## Silkscreen, mask and mechanical layers (free items; w line width, h text height)
Top Overlay:
  lines w10: 1823.12,2568.27 1823.12,2710 1929.42,2710 1929.42,3473.78 1823.12,3473.78 1823.12,4024.96 5169.57,4024.96 5169.57,3473.78 5063.27,3473.78 5063.27,2710 5169.57,2710 5169.57,2568.27 1823.12,2568.27
  text "ALTO" at 2390,3730 h60
  text "ON/OFF" at 4204.37,3688.48 h60
  text "12" at 1970,3425 h50
  text "MEDIO" at 2385,3340 h60
  text "G" at 4885,3335 h45 r90
  text "O" at 4892.37,3140.48 h45 r90
  text "DC" at 4885.37,3031.48 h40 r90
  text "C. VEL." at 4264.37,2938.48 h60
  text "BAJO" at 2380,2935 h60
  text "VCC" at 4885.37,2901.48 h40 r90
  text "G" at 1985,2825 h50

## Text inside footprints (layer, text, board x,y; h text height)
BZ1: Top Overlay "+" at 3057.17,3831.3 h66.93 r180